# Altium PCB PCB1.PcbDoc (part 2 of 3)
Units mm, origin at the board's own origin, x right, y up, seen from the top; angles counter-clockwise.
Board outline 152.4 x 101.6 mm, 2 copper layers (Top Layer, Bottom Layer); 246 components, 0 nets, 683 pads, 311 vias.
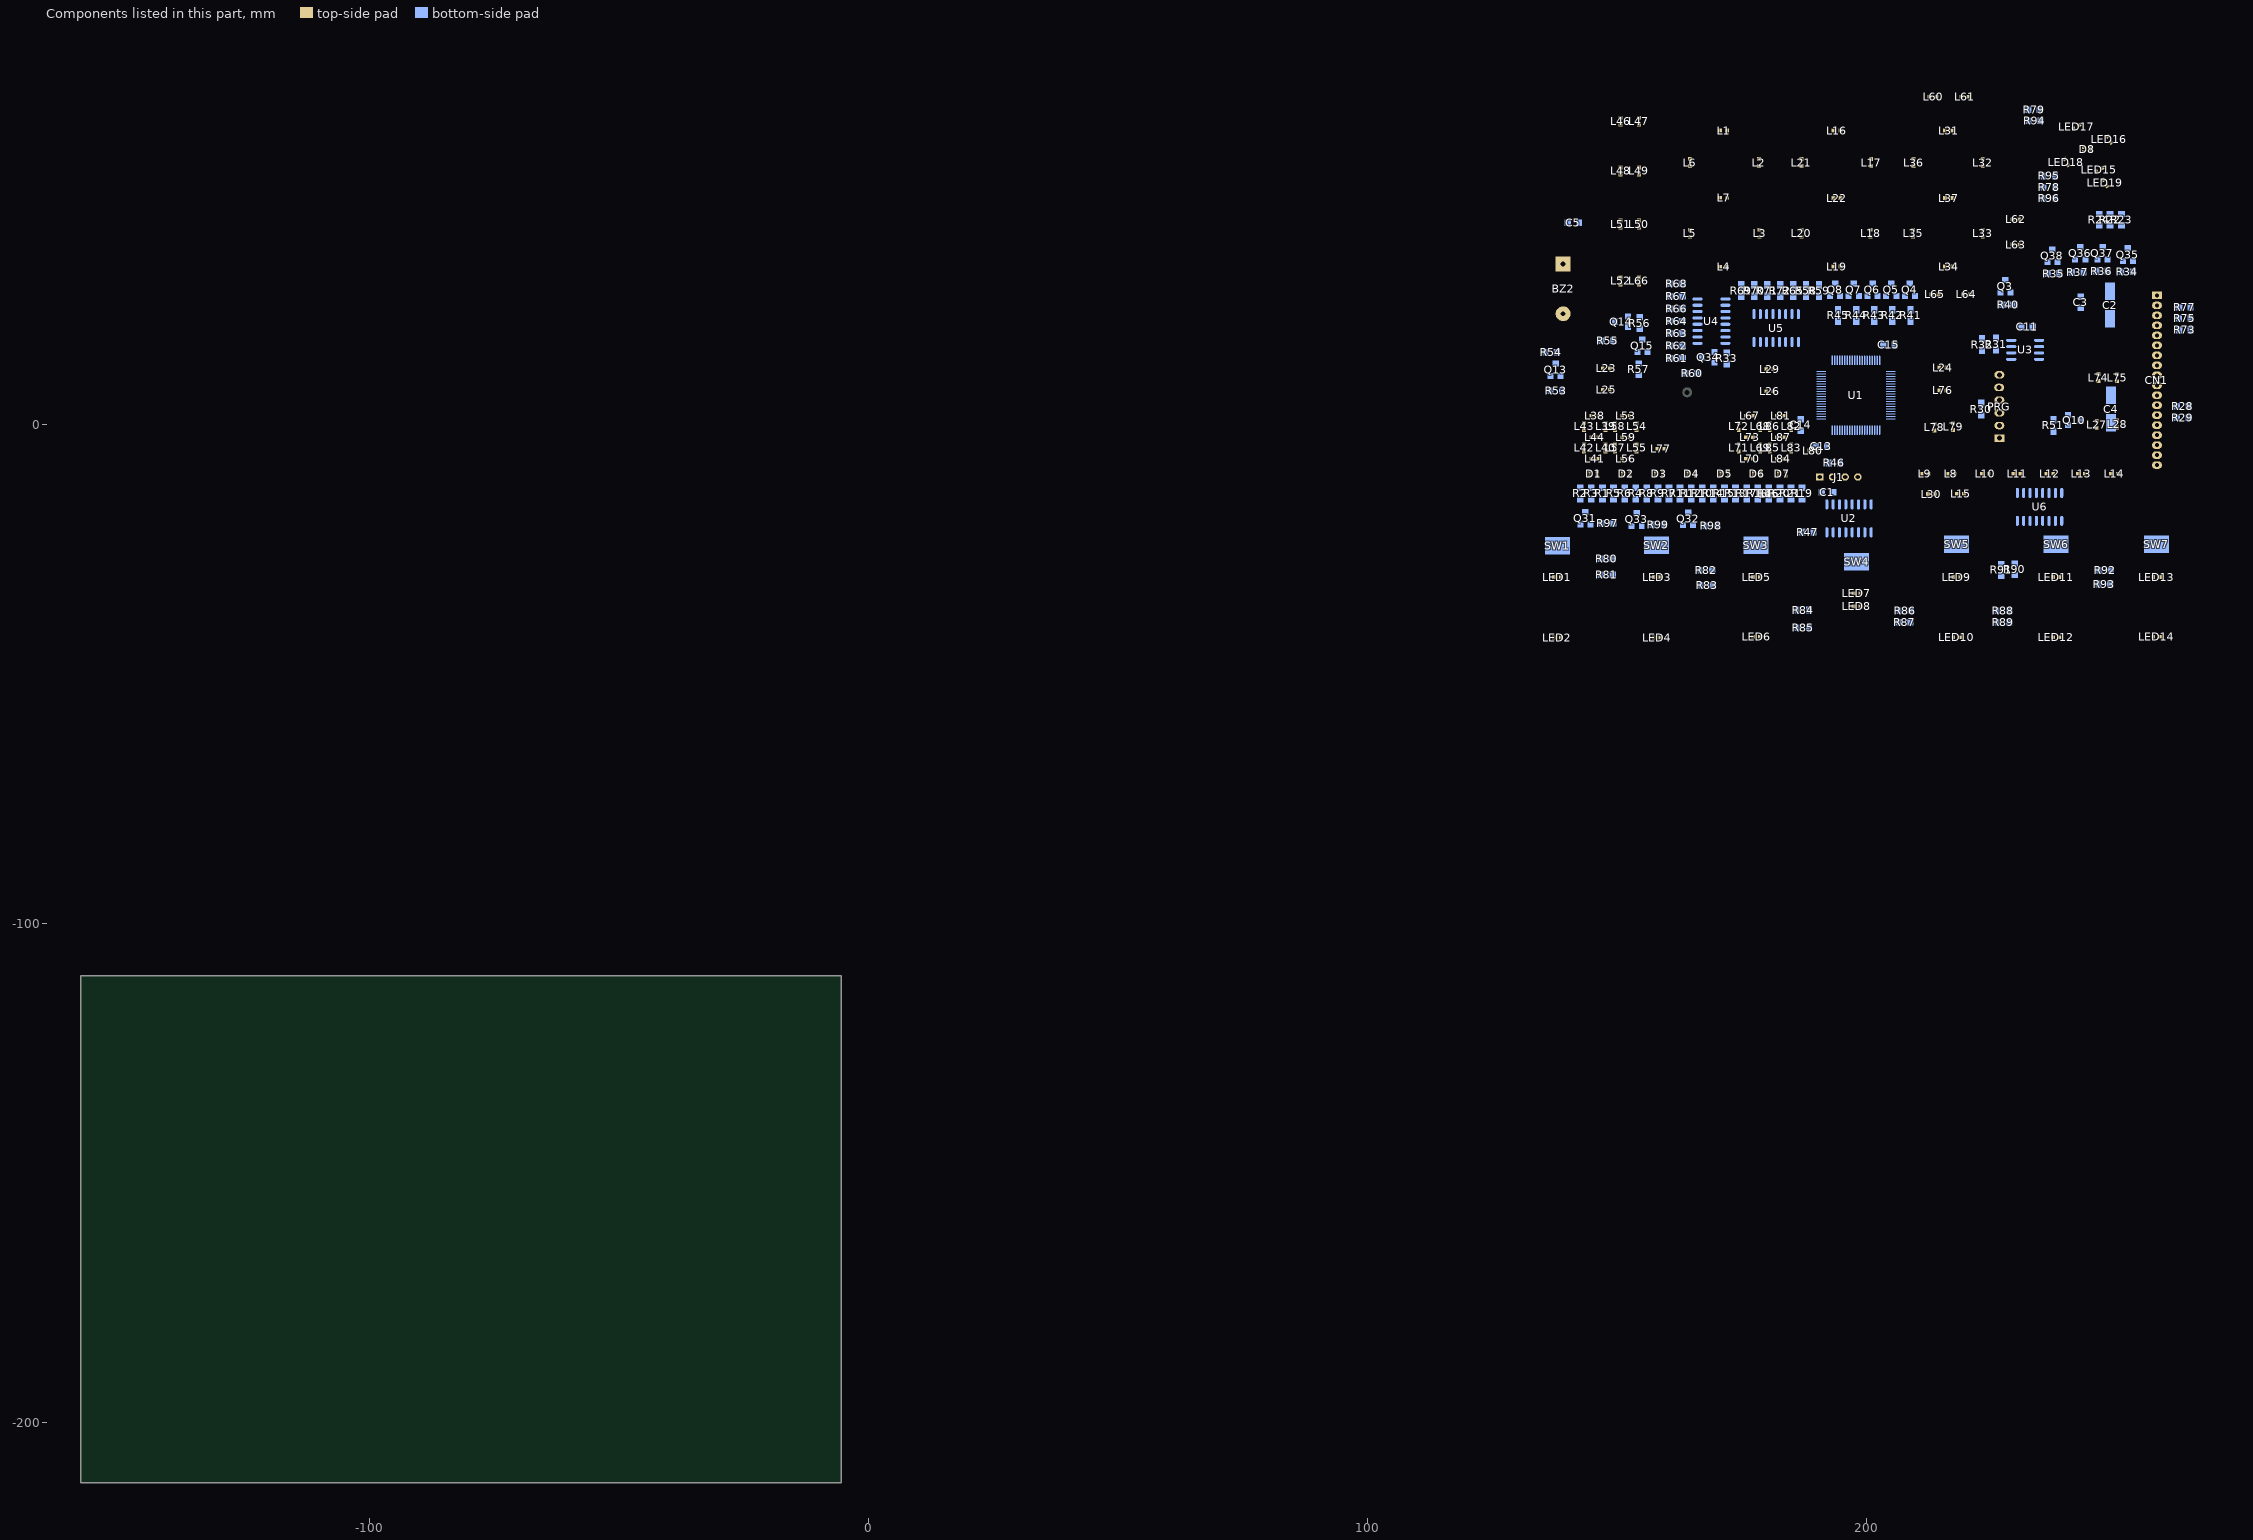
[diagram p2: the components of this part, seen from the top]

## Via types
v1: diameter 1, hole 0.6, Top Layer to Bottom Layer, 214 vias
v2: diameter 1.27, hole 0.711, Top Layer to Bottom Layer, 93 vias
v3: diameter 0.8, hole 0.4, Top Layer to Bottom Layer, 3 vias
v4: diameter 1, hole 0.5, Top Layer to Bottom Layer, 1 vias

## Nets (pads, with @x,y where several pads share a name; then routed paths per layer and width w, separated by ;. In a path a pad name is that pad's centre, name@x,y a point inside that pad or via, vN(x,y) a via of type N, cw(c..) or ccw(c..) an arc to the next point about the centre after c; other vN are vias at no path point) (continued)
copper on no net: | length 9829.2
  Top Layer w0.25: v1(138.952,1.055) 139.161,1.055 140.278,-0.062 140.278,-9.237 142.966,-11.924 143.244,-12.202 143.638,-12.202 144.661,-13.225 177.214,-13.225 179.054,-15.065 181.858,-15.065 183.916,-13.008 208.082,-13.008 211.104,-16.03 219.189,-16.03 220.71,-14.509 220.71,-11.563 v1(220.69,-11.543) ; v1(143.398,-9.906) 143.398,-9.918 143.448,-9.968 143.626,-9.968 144.006,-10.348 144.489,-10.348 ; 147.624,-1.128 148.31,-1.128 149.016,-1.834 150.047,-1.834 150.237,-1.644 150.237,-1.05 150.615,-0.672 152.035,-0.672 152.25,-0.887 153.404,-0.887 153.734,-1.218 153.824,-1.128 v1@158.079,-1.128 ; v1@148.45,-0.657 v1@148.579,-0.786 ; v1(158.079,-1.027) v1@158.079,-1.128 ; 184.825,-1.127 184.798,-1.127 184.266,-0.596 182.463,-0.596 181.226,-1.833 179.154,-1.833 178.625,-1.304 178.625,-1.127 178.141,-1.612 177.333,-1.612 176.47,-0.748 175.859,-0.748 175.024,-1.583 175.024,-1.643 174.833,-1.833 173.802,-1.833 173.096,-1.128 v1@158.079,-1.128 ; v1(188.203,-1.078) 188.406,-1.078 188.635,-0.85 189.092,-0.85 190.718,-2.475 v1(191.454,-2.475) ; v1(189.524,-8.266) 190.553,-9.295 190.553,-10.558 ; 189.854,-5.274 192.389,-5.274 194.528,-3.136 194.528,0.065 194.807,0.344 196.306,0.344 196.585,0.624 196.991,0.624 197.715,1.347 197.715,3.837 196.407,5.145 190.489,5.145 189.854,5.78 189.854,8.853 ; v1(195.518,29.046) 195.645,28.919 208.03,28.919 208.445,28.504 208.445,26.749 213.074,22.12 215.602,22.12 216.818,20.904 216.818,16.005 214.517,13.705 214.517,13.699 213.73,12.911 213.73,12.181 209.666,8.117 209.666,5.373 ; v1(197.068,-3.186) 204.053,-3.186 v1(206.034,-5.168) ; v2(198.312,31.231) 206.355,31.231 208.895,28.691 208.895,26.936 213.261,22.57 215.788,22.57 217.268,21.091 217.268,15.813 214.492,13.037 214.492,11.377 ; v2(198.795,1.055) 201.716,1.055 205.678,-2.907 v1(205.881,-2.907) ; v1(199.252,9.463) 201.919,9.463 205.805,13.349 v1(207.355,13.349) ; v1@201.068,14.911 v1(201.233,15.076) ; v1(210.707,-9.054) 210.707,-9.705 210.923,-9.921 ; v1(212.231,8.421) 213.847,6.805 214.492,6.805 ; 213.501,0.128 213.501,2.478 219.293,8.269 219.293,11.19 218.625,11.858 218.625,22.257 222.214,25.846 v1(222.214,27.217) ; 215.025,23.131 215.864,23.131 217.718,21.277 v1(217.718,10.225) ; 215.381,23.585 216.245,23.585 218.168,21.662 218.168,20.773 218.175,20.766 218.175,11.596 218.759,11.012 218.759,9.666 217.248,8.155 ; 215.889,11.377 215.889,10.098 v1(215.94,10.047) ; v1(217.438,-5.828) 217.501,-5.765 220.627,-5.765 220.893,-6.031 233.161,-6.031 v1(234.202,-4.99) ; v1(218.023,-2.805) 219.647,-2.805 220.385,-3.544 220.385,-3.905 220.817,-4.337 221.818,-4.337 222.163,-4.681 231.362,-4.681 232.367,-3.676 237.929,-3.676 244.457,2.852 249.637,2.852 251.829,5.044 251.829,6.771 253.556,8.498 256.199,8.498 256.199,13.905 258.117,15.823 ; v1(218.353,-1.561) 219.147,-2.355 219.833,-2.355 221.248,-3.771 221.248,-3.796 221.914,-3.796 222.349,-4.231 231.175,-4.231 232.804,-2.602 v2(235.345,-2.602) ; v1(218.48,0.878) 218.701,1.099 220.443,1.099 221.236,0.306 223.395,0.306 224.017,-0.316 224.017,-1.078 v1(223.788,-1.307) ; v1(218.81,-6.59) 235.066,-6.59 v1(235.295,-6.361) ; v1@219.191,-0.926 220.588,-2.323 221.96,-2.323 v1(222.874,-3.237) ; v1(219.267,-4.939) 219.552,-4.939 219.928,-5.315 221.135,-5.315 221.401,-5.581 232.45,-5.581 232.653,-5.378 v1(232.653,-5.193) ; v1(219.394,-3.72) 220.461,-4.787 221.412,-4.787 221.756,-5.131 231.548,-5.131 232.553,-4.126 236.158,-4.126 236.209,-4.177 237.987,-4.177 238.012,-4.202 238.23,-4.202 244.834,2.402 249.823,2.402 252.516,5.094 252.516,6.821 253.517,7.823 258.117,7.823 ; v1(219.611,0.274) 220.557,-0.672 v1(222.62,-0.672) ; v1(220.842,18.912) 223.306,21.375 223.306,22.188 241.06,22.188 250.116,13.133 250.116,10.044 250.1,10.06 246.394,10.06 ; v1(220.969,12.231) 221.311,12.574 222.835,12.574 223.888,11.52 231.078,11.52 231.891,10.707 238.412,10.707 238.444,10.675 240.407,10.675 243.042,8.04 243.118,8.04 243.321,8.244 v1(243.118,8.244) ; v1(222.493,11.749) 223.204,11.038 230.672,11.038 231.485,10.225 238.317,10.225 v1(242.483,6.059) ; v1(228.259,18.581) 234.348,18.581 236.557,16.372 v1(237.123,16.372) ; v1(228.868,19.699) 235.98,19.699 v1(237.073,18.607) ; 230.786,-9.295 232.018,-8.063 236.59,-8.063 237.314,-8.787 237.314,-9.422 237.314,-9.921 ; v1(234.685,28.513) 237.53,25.668 v1(237.53,23.153) ; v2(236.412,12.257) 243.677,12.257 v1(245.607,14.187) ; v1(237.936,-8.19) 237.936,-7.86 244.921,-0.875 244.921,0.37 245.213,0.662 246.064,0.662 ; v1(240.73,-11.391) 240.73,-9.921 ; v1(241.314,-7.682) 241.314,-7.403 242.241,-6.476
  Top Layer w0.254: v2(136.235,-30.593) 136.251,-30.609 137.277,-30.609 ; v1(136.641,-3.313) 136.989,-3.661 136.989,-9.155 142.403,-14.569 142.797,-14.569 143.721,-15.493 176.26,-15.493 178.151,-17.385 182.746,-17.385 184.855,-15.276 207.142,-15.276 210.165,-18.298 222.937,-18.298 228.455,-12.781 246.036,-12.781 248.896,-9.921 ; 137.277,-42.725 137.277,-42.278 v2(136.412,-41.413) 137.809,-40.016 144.515,-40.016 147.223,-42.725 157.252,-42.725 157.252,-41.272 158.482,-40.042 v2(174.662,-40.042) 177.177,-42.556 ; v1(137.301,-0.088) 137.581,-0.088 137.581,-5.302 137.443,-5.44 137.443,-8.967 142.591,-14.115 142.985,-14.115 143.909,-15.039 176.448,-15.039 176.865,-15.457 176.88,-15.457 178.302,-16.879 182.61,-16.879 184.667,-14.822 207.33,-14.822 210.353,-17.844 222.749,-17.844 228.267,-12.327 232.021,-12.327 233.72,-10.629 238.546,-10.629 239.254,-9.921 240.73,-9.921 242.241,-9.921 242.381,-10.06 ; 138.674,-42.725 139.8,-42.725 v2(139.968,-42.556) ; 138.674,-30.609 140.028,-30.609 v2(140.095,-30.542) ; v1(138.724,-6.463) 138.673,-6.514 139.372,-7.213 139.372,-9.612 142.928,-13.168 143.322,-13.168 144.285,-14.131 176.824,-14.131 177.241,-14.549 177.256,-14.549 178.679,-15.971 182.233,-15.971 184.291,-13.914 207.707,-13.914 210.729,-16.936 222.373,-16.936 229.389,-9.921 ; v1(138.978,-4.507) 138.876,-4.406 138.876,-4.787 137.897,-5.766 137.897,-8.779 142.747,-13.628 143.141,-13.628 144.097,-14.585 176.636,-14.585 177.053,-15.003 177.068,-15.003 178.491,-16.425 182.421,-16.425 184.479,-14.368 207.518,-14.368 210.541,-17.39 222.561,-17.39 228.079,-11.873 231.485,-11.873 233.437,-9.921 235.917,-9.921 ; v1(140.299,2.325) 140.73,1.894 140.73,-9.05 143.431,-11.75 143.825,-11.75 144.848,-12.773 177.401,-12.773 179.241,-14.613 181.671,-14.613 183.728,-12.556 208.269,-12.556 211.292,-15.578 212.654,-15.578 212.882,-15.35 219.23,-15.35 220.258,-14.322 220.258,-12.686 v1(219.47,-11.899) ; v1(142.051,-7.225) 141.238,-6.412 141.238,3.037 ; v2@142.61,-16.521 142.61,-17.309 142.864,-17.563 149.138,-17.563 149.214,-17.639 v1(156.123,-17.639) 162.346,-17.639 162.422,-17.563 v1(162.422,-17.512) v1(169.331,-17.512) 175.249,-17.512 175.63,-17.893 175.63,-18.757 176.189,-19.315 183.352,-19.315 v1(184.241,-18.426) ; v1(143.042,11.063) 143.042,43.219 146.445,46.623 146.445,61.304 149.967,64.826 155.472,64.826 156.812,63.485 190.816,63.485 194.451,67.121 v1(194.655,67.121) ; 143.317,-4.038 145.543,-4.038 146.268,-3.313 148.807,-3.313 149.531,-4.038 149.769,-4.275 152.062,-4.275 153.227,-3.11 173.39,-3.11 174.318,-4.038 176.792,-4.038 177.5,-3.33 179.99,-3.33 180.518,-3.858 180.518,-4.038 ; 143.317,0.269 v1@144.821,0.269 ; v2(143.702,-8.571) 144.489,-9.358 144.489,-9.498 ; v1(143.778,3.189) 144.773,2.195 144.773,1.726 143.356,1.726 142.559,0.928 142.559,-0.748 142.939,-1.128 143.118,-1.128 ; v1(144.744,-5.701) 144.744,-6.881 144.773,-6.91 145.481,-6.202 147.556,-6.202 148.264,-6.91 150.973,-6.91 150.973,-7.155 151.551,-7.733 163.159,-7.733 ; v1(144.794,0.243) v1@144.821,0.269 ; v1@144.871,0.293 v1@144.846,0.269 ; v1@145.175,-11.492 145.939,-10.729 145.939,-10.348 ; v1(145.531,-18.579) 145.782,-18.83 151.878,-18.83 v1(151.881,-18.833) 158.282,-18.833 v1(158.51,-18.604) 166.461,-18.604 v1(166.511,-18.553) 170.855,-18.553 171.185,-18.884 v1(171.287,-18.884) 175.02,-18.884 ; 145.939,-9.498 146.129,-9.689 146.903,-9.689 147.131,-9.917 147.131,-11.289 v1(147.055,-11.365) ; 146.17,-6.91 145.455,-7.625 144.179,-7.625 143.748,-7.195 ; 146.17,-2.581 149.396,-2.581 150.636,-3.821 151.754,-3.821 152.37,-3.206 152.37,-2.581 159.628,-2.581 160.63,-1.58 163.935,-1.58 164.937,-2.581 174.086,-2.581 174.97,-3.466 176.722,-3.466 177.17,-3.018 177.17,-2.582 180.748,-2.582 181.456,-3.29 182.92,-3.29 183.37,-2.84 183.37,-2.582 ; 146.17,1.726 148.717,1.726 149.465,0.977 151.449,0.977 152.197,1.726 152.37,1.726 174.45,1.726 175.324,0.852 176.296,0.852 177.17,1.725 180.288,1.725 181.187,0.827 182.471,0.827 183.37,1.725 ; v1(146.268,-5.168) 147.233,-5.168 147.624,-5.559 ; v1(146.852,-16.394) 146.877,-16.42 v1(153.837,-16.42) v1(160.161,-16.42) 160.212,-16.369 v1(167.096,-16.369) 167.223,-16.496 v1(173.522,-16.496) 174.084,-17.058 175.437,-17.058 176.084,-17.705 176.084,-18.477 176.468,-18.861 180.38,-18.861 180.764,-18.477 v1(181.193,-18.477) 182.536,-18.477 183.414,-17.599 183.936,-17.599 183.987,-17.549 186.134,-17.549 186.781,-16.902 v1(186.781,-16.521) ; 147.055,6.932 147.055,7.99 ; 147.055,11.25 147.055,7.99 ; 147.624,-5.435 147.624,-5.559 ; 147.624,-4.038 146.185,-4.038 145.614,-4.609 144.143,-4.609 143.317,-5.435 ; 147.624,0.269 146.531,-0.824 145.48,-0.824 144.773,-1.532 144.773,-2.581 143.319,-1.128 143.317,-1.128 143.118,-1.128 ; 148.452,6.932 148.452,6.288 147.207,5.043 143.245,5.043 141.238,3.037 ; 148.452,11.25 148.512,11.19 v1(150.078,11.19) ; v1(148.833,-11.289) 148.782,-11.238 148.782,-10.425 149.712,-9.496 151.061,-9.496 ; 149.531,-5.435 151.708,-5.435 152.162,-4.981 152.881,-4.981 153.824,-4.038 ; 149.531,-1.128 149.531,-1.117 150.442,-0.205 151.719,-0.205 152.194,0.269 153.824,0.269 ; v4@150.001,1.716 150.963,1.716 150.973,1.726 ; v1(150.128,8.98) 150.332,8.98 150.905,9.553 150.905,11.76 149.341,13.324 149.341,26.773 150.611,28.043 149.557,28.043 149.227,28.373 149.227,39.422 ; 150.611,29.44 154.294,29.44 154.662,29.808 v1(155.259,29.808) ; 150.611,40.819 150.611,41.01 155.691,46.09 157.291,46.09 161.508,50.306 v2(161.508,50.738) ; 150.611,51.487 150.611,52.617 151.906,53.913 155.335,53.913 158.993,50.255 v2(158.993,49.925) ; 150.611,61.419 150.611,61.914 151.729,63.031 169.966,63.031 171.947,61.05 171.947,58.875 179.094,58.875 181.802,61.584 v2@190.311,61.584 ; v2(150.865,-25.818) 150.078,-26.605 150.078,-35.394 153.583,-38.899 165.419,-38.899 167.553,-36.765 167.553,-25.894 173.141,-20.306 187.564,-20.306 192.14,-15.73 205.272,-15.73 208.959,-19.417 v2(228.818,-19.417) ; 150.973,-2.581 150.973,-1.783 v1(151.221,-1.535) ; v1@151.652,-11.543 152.511,-10.685 152.511,-10.346 ; 152.37,-6.91 152.385,-6.895 v1(153.532,-6.895) ; 152.511,-9.496 153.796,-9.496 153.964,-9.663 v1(153.964,-10.806) ; 154.294,28.043 154.294,26.1 153.913,26.1 v1(153.888,26.074) 149.795,21.982 149.795,13.512 151.525,11.781 151.525,8.962 156.87,3.618 158.597,3.618 159.203,3.011 171.16,3.011 v1(171.21,3.062) ; 154.294,39.448 154.269,39.422 150.611,39.422 149.227,39.422 ; 154.294,40.819 162.701,40.819 164.52,39 171.283,39 172.912,40.629 185.244,40.629 186.872,39 188.174,39 189.676,40.502 207.723,40.502 209.224,39 209.507,39.282 v2(211.546,39.282) ; 154.294,50.065 154.269,50.09 150.611,50.09 148.896,50.09 ; 154.294,51.462 155.577,51.462 157.139,49.9 v2(157.139,47.868) ; 154.294,61.419 165.102,61.419 165.775,60.745 v2(169.904,60.745) ; v1(155.615,-11.137) 155.615,-10.07 156.189,-9.496 157.633,-9.496 ; v2(155.615,7.329) 156.275,7.99 156.275,10.504 157.977,12.206 167.319,12.206 169.729,9.796 173.036,9.796 175.325,7.507 v1(175.859,7.507) ; v1(155.869,11.901) 156.707,12.739 167.604,12.739 168.678,11.665 168.678,11.489 169.906,10.261 172.952,10.261 172.963,10.25 174.716,10.25 176.341,8.625 v1(177.179,8.625) ; v2(156.072,-30.618) 157.243,-30.618 157.252,-30.609 ; v1(157.774,-6.285) 157.774,-5.082 157.977,-4.879 ; v1@158.307,-11.619 158.307,-11.121 159.083,-10.346 ; 158.649,-42.725 159.593,-42.725 v2(159.831,-42.963) ; 158.649,-30.609 158.716,-30.542 v2(159.831,-30.542) ; 159.083,-9.496 160.121,-9.496 160.492,-9.867 v1(160.492,-11.213) ; 159.374,-4.879 160.058,-5.563 164.287,-5.563 165.038,-4.812 165.038,-4.71 165.191,-4.71 v1(165.216,-4.736) ; v1(161.939,60.212) 161.749,60.022 154.294,60.022 150.611,60.022 148.681,58.091 148.681,50.306 148.896,50.09 ; v1(161.99,-4.736) 161.99,-3.898 ; v1(162.092,39.13) 162.092,33.186 161.317,32.412 161.317,31.904 150.249,20.836 150.249,13.7 151.979,11.969 151.979,9.15 157.058,4.072 159.225,4.072 159.831,3.465 165.292,3.465 165.676,3.849 v1(165.927,3.849) ; v1(162.193,-11.238) 161.99,-11.035 161.99,-10.222 162.717,-9.496 164.205,-9.496 164.145,-9.435 ; v1(162.498,0.141) 162.193,0.446 162.193,0.977 ; v1@162.752,-2.958 162.752,-2.602 v1@162.816,-2.539 ; v1(163.133,-6.819) 163.159,-6.844 163.159,-7.733 ; 164.52,53.138 v2@166.765,53.138 ; v1@164.886,-11.568 165.655,-10.799 165.655,-10.346 ; v1@165.368,-2.323 v1(165.419,-2.272) ; 165.655,-9.496 166.267,-9.496 167.172,-10.4 167.146,-10.425 v1(167.146,-11.035) ; v2(166.765,53.125) v2@166.765,53.138 ; v1(168.924,-11.441) 168.721,-11.238 168.721,-9.943 169.168,-9.496 170.778,-9.496 ; v2(169.102,-30.542) 169.102,-25.665 174.008,-20.76 187.752,-20.76 192.27,-16.242 205.018,-16.242 209.387,-20.611 v2(227.471,-20.611) ; v2(169.382,33.009) 170.55,31.84 170.55,31.57 ; v1(169.483,27.421) 171.49,29.427 192.496,29.427 v3@192.572,29.503 ; v1(169.509,19.115) 169.331,18.937 169.331,17.997 178.449,8.879 178.449,7.863 177.684,7.097 176.619,7.097 174.996,5.475 v1(172.328,5.475) ; v2(169.864,40.375) 170.55,41.06 170.55,45.413 170.55,45.712 164.52,51.741 162.993,51.741 162.117,52.617 162.117,55.869 165.124,58.875 170.55,58.875 170.55,53.887 170.575,53.887 171.324,53.138 178.361,53.138 ; v2(170.245,37.581) v2@170.245,37.603 ; 170.382,31.739 170.55,31.57 ; 171.856,34.101 171.947,34.101 ; v1(171.896,-11.492) 171.896,-10.677 172.228,-10.346 ; 171.947,31.57 171.947,34.101 ; v2(172.023,44.185) 172.023,45.337 171.947,45.413 179.729,45.413 181.294,46.979 194.121,46.979 194.683,46.417 194.683,45.328 195.011,45.328 197.042,47.36 215.584,47.36 217.035,45.909 217.035,45.328 ; 172.228,-9.496 172.998,-9.496 173.623,-10.121 173.623,-10.883 v1(173.7,-10.959) ; v1(172.531,28.005) 175.122,28.005 v1(183.326,19.801) ; v2(173.014,35.65) 177.967,35.65 v2(178.5,36.184) 178.5,37.59 178.488,37.603 180.383,37.603 182.437,35.549 198.658,35.549 200.713,37.603 202.354,37.603 205.424,34.533 220.136,34.533 v2@221.937,36.333 ; 174.318,-5.435 174.779,-5.435 175.63,-4.583 178.079,-4.583 178.625,-4.038 ; 174.318,-1.127 174.514,-1.127 175.372,-0.269 177.158,-0.269 177.696,0.27 178.625,0.27 ; v1(174.639,-18.503) 175.02,-18.884 ; v1(175.655,2.554) 175.773,2.437 175.773,1.725 ; 175.773,-2.582 175.773,-2.002 v1(176.163,-1.612) ; v1@175.782,-11.264 175.147,-11.264 174.69,-10.806 174.69,-9.968 175.579,-9.079 176.838,-9.079 177.255,-9.496 ; v2(176.062,-30.593) 177.16,-30.593 177.177,-30.609 ; v2(176.392,51.525) 176.608,51.741 178.361,51.741 179.961,51.741 183.58,55.361 v2@187.898,55.361 ; 177.17,-6.911 177.957,-6.911 v1(178.094,-7.047) ; v1@178.17,-11.645 178.17,-10.88 178.705,-10.346 ; 178.488,39 173.671,39 171.947,37.276 ; 178.574,-42.556 179.846,-42.556 v2(180.024,-42.379) ; 178.574,-30.609 179.914,-30.609 v2(179.948,-30.644) ; v1(178.78,5.119) 180.024,5.119 181.231,6.326 181.231,6.643 ; 178.842,-9.359 178.705,-9.496 179.196,-9.496 179.567,-9.867 179.567,-11.289 v1(179.694,-11.416) ; v1(178.881,2.96) 178.881,3.748 179.799,4.665 180.212,4.665 181.482,5.935 181.747,5.935 182.209,6.397 182.209,9.336 181.231,10.314 181.231,11.063 ; 179.757,-13.905 179.757,-13.435 178.558,-12.236 176.189,-12.236 176.106,-12.319 145.036,-12.319 143.772,-11.055 143.378,-11.055 142.534,-10.211 142.534,-8.19 143.529,-7.195 143.748,-7.195 ; 180.518,-5.435 180.545,-5.435 181.824,-4.155 183.084,-4.155 183.512,-4.583 184.279,-4.583 184.825,-4.038 ; 180.52,-1.127 180.52,-1.065 181.828,0.243 184.798,0.243 ; 180.52,0.27 179.734,1.055 177.84,1.055 177.054,0.27 174.318,0.27 173.61,0.977 162.193,0.977 ; 181.154,-13.905 181.154,-13.207 182.259,-12.102 201.741,-12.102 ; v1(181.218,3.189) 181.218,3.316 181.548,3.646 193.181,3.646 v1(195.544,1.284) ; v1(181.548,-11.568) 180.837,-11.568 180.521,-11.252 180.521,-11.073 180.253,-10.805 180.253,-10.756 180.021,-10.524 180.021,-10.044 180.681,-9.384 182.223,-9.384 182.335,-9.496 182.335,-9.459 ; v1(181.828,4.688) 182.031,4.484 195.213,4.484 v1(196.89,2.808) ; 181.973,-2.582 181.973,-2.127 182.742,-1.358 183.529,-1.358 v1(184.825,-2.653) 184.825,-4.038 ; 181.973,1.725 181.973,1.861 183.021,2.91 183.961,2.91 184.798,2.073 184.798,0.243 ; 182.31,34.533 182.437,34.66 ; v1(182.691,-5.574) 181.973,-6.292 181.973,-6.889 179.409,-6.889 178.722,-6.203 176.195,-6.203 175.773,-6.625 175.773,-6.911 174.95,-7.733 163.159,-7.733 ; 183.37,-6.889 184.983,-6.889 186.062,-5.81 186.062,-5.274 ; 183.518,-5.233 183.72,-5.435 184.825,-5.435 ; 183.518,-5.231 182.896,-4.609 182.209,-4.609 181.281,-5.536 181.281,-6.018 181.066,-6.234 179.425,-6.234 178.625,-5.435 178.311,-5.749 175.228,-5.749 174.834,-6.143 173.801,-6.143 171.556,-3.898 161.99,-3.898 ; 183.785,-10.346 184.389,-10.346 v1(185.104,-11.06) ; 183.785,-9.496 184.709,-9.496 186.248,-11.035 v1(186.781,-11.035) ; 184.823,0.217 184.798,0.243 ; 184.825,0.27 184.798,0.243 ; v1(185.307,-7.809) 185.917,-7.809 187.72,-6.006 199.1,-6.006 201.741,-8.647 201.741,-12.102 ; v1(186.044,-18.426) 186.044,-19.087 185.279,-19.852 175.989,-19.852 175.02,-18.884 ; 186.872,37.603 197.318,37.603 198.715,39 200.713,39 ; 186.872,51.741 189.231,51.741 v2(192.216,48.757) ; v1@187.619,18.835 187.619,16.829 189.854,14.594 189.854,8.853 ; v2(187.898,55.488) v2@187.898,55.361 ; v2(188.432,-38.924) 190.108,-38.924 193.054,-41.871 204.307,-41.871 206.821,-39.356 206.821,-24.174 209.8,-21.195 224.068,-21.195 224.957,-22.084 v2(227.014,-22.084) ; 188.457,-5.295 188.457,-5.274 186.062,-5.274 ; v2(190.311,61.711) v2@190.311,61.584 ; v2(191.53,31.688) 190.616,32.602 176.113,32.602 173.779,30.269 169.658,30.269 164.52,35.406 164.52,37.603 v2@170.245,37.603 ; v1@191.886,-18.68 v1(191.886,-18.553) ; v2(192.216,45.074) 192.471,45.328 193.286,45.328 ; 193.286,58.875 193.286,57.847 193.994,57.139 195.391,57.139 199.391,53.138 200.84,53.138 ; v3(194.985,7.151) 194.985,13.273 195.188,13.476 ; v1(196.509,15.051) 196.509,16.219 197.88,17.591 213.324,17.591 v1(214.035,16.88) ; v1(197.093,32.475) 207.431,32.475 v1(208.625,31.281) ; 197.277,-36.502 197.277,-33.835 ; v2(198.312,31.231) 197.931,31.612 194.683,31.612 194.683,31.03 194.375,30.723 194.375,28.945 193.893,28.462 190.413,28.462 188.559,26.608 188.559,20.664 184.761,16.867 182.17,16.867 179.834,14.53 179.834,11.063 179.834,6.643 177.256,6.643 172.792,2.18 159.393,2.18 158.409,3.164 156.682,3.164 151.856,7.99 147.055,7.99 ; 198.674,-36.502 198.715,-36.46 v2(200.42,-36.46) ; 198.674,-33.835 199.649,-33.835 v2@199.658,-33.844 ; v1(200.192,16.041) 201.233,17.083 211.495,17.083 v1(212.892,15.686) ; 200.84,51.741 203.71,51.741 207.075,55.107 217.997,55.107 221.362,51.741 223.192,51.741 225.198,51.741 225.668,52.211 225.668,56.935 220.296,62.308 220.296,65.648 ; 201.233,51.805 199.328,51.805 195.772,55.361 v2@187.898,55.361 ; v2(205.805,50.789) v2@205.742,50.852 ; v1(206.364,35.904) 208.063,37.603 209.224,37.603 216.749,37.603 218.132,38.985 ; 209.349,51.741 210.682,50.408 215.33,50.408 ; 209.349,53.138 209.031,52.821 207.71,52.821 v2@205.742,50.852 ; v1(209.666,-3.517) 209.666,5.373 ; v1(210.225,-6.539) 210.225,-7.276 212.32,-9.371 ; v2(211.139,-39.153) 223.001,-39.153 226.506,-35.648 226.506,-25.259 v2(228.868,-22.897) ; v1(211.622,30.291) 211.52,30.189 211.52,25.592 213.527,23.585 215.381,23.585 ; 212.206,-13.987 211.577,-13.987 209.387,-11.797 209.387,-4.99 209.818,-4.558 210.707,-4.558 ; 212.32,-10.133 212.32,-9.921 212.32,-9.371 ; 212.549,65.648 212.549,66.626 213.4,67.476 218.023,67.476 218.899,66.6 ; v1(212.612,27.141) 212.93,26.824 212.93,26.024 212.93,25.439 213.616,24.754 219.356,24.754 220.626,26.024 220.626,27.052 222.506,28.932 224.944,28.932 v2(227.624,31.612) ; 213.946,65.648 213.946,61.012 214.009,60.949 ; 214.327,26.024 214.327,29.592 211.927,31.993 v2(211.876,31.993) 210.163,30.28 209.831,30.28 209.347,29.795 209.347,27.123 213.339,23.131 215.025,23.131 ; 214.492,6.805 214.492,4.84 211.952,2.3 211.952,0.281 213.501,-1.269 217.159,-1.269 217.261,-1.167 ; 214.492,11.377 213.587,11.377 210.707,8.498 210.707,-4.558 ; 215.638,45.328 215.638,41.479 218.132,38.985 ; 215.638,58.875 215.638,57.72 217.489,55.869 219.521,55.869 222.251,53.138 223.192,53.138 ; 215.889,6.805 215.899,6.805 217.248,8.155 ; v2(215.991,-30.618) 217.268,-30.618 217.277,-30.609 ; v2(216.092,53.456) 215.33,52.694 215.33,50.408 ; 216.13,-9.921 216.13,-10.768 v1(216.727,-11.365) ; v2(216.524,-41.972) v2@216.56,-41.972 ; 217.035,31.612 219.776,31.612 224.347,36.184 224.347,38.724 224.086,38.985 223.192,38.985 ; 217.035,58.875 217.035,59.879 215.965,60.949 214.009,60.949 ; 217.261,0.23 217.261,4.662 v1(220.334,7.736) ; 217.277,-42.689 v2@216.56,-41.972 ; 218.048,-13.91 218.048,-10.441 217.527,-9.921 ; 218.674,-42.689 220.67,-42.689 v2(220.69,-42.709) ; 218.674,-30.609 219.962,-30.609 v2(220.055,-30.517) ; v2(218.861,27.675) 219.229,27.306 219.229,26.024 ; 218.899,65.648 218.899,66.6 ; 219.445,-13.91 219.445,-14.388 218.937,-14.896 214.512,-14.896 213.603,-13.987 212.466,-15.124 211.495,-15.124 208.472,-12.102 201.741,-12.102 ; v2(221.883,36.387) v2@221.937,36.333 ; 222.988,-9.921 222.988,-10.783 221.162,-12.61 221.162,-14.703 219.382,-16.482 210.917,-16.482 207.895,-13.46 184.103,-13.46 182.045,-15.517 178.867,-15.517 177.444,-14.095 177.027,-13.677 144.474,-13.677 143.478,-12.682 143.084,-12.682 142.887,-12.485 139.826,-9.424 139.826,-0.875 138.723,0.228 138.61,0.228 137.936,0.902 137.936,1.868 139.221,3.152 140.641,3.152 140.757,3.037 141.238,3.037 ; 223.192,37.588 v2@221.937,36.333 ; 223.306,22.188 225.287,24.169 225.287,24.855 225.465,25.033 v1(225.465,27.979) ; 226.532,4.84 228.183,3.189 v1(240.171,3.189) ; v2(227.573,34.609) 228.97,36.006 229.135,36.006 229.135,41.06 227.852,41.06 226.786,42.127 226.786,65.495 224.271,68.01 220.309,68.01 218.899,66.6 ; v1(227.878,51.525) 233.669,45.734 233.669,31.183 235.512,29.34 235.512,28.6 251.373,12.739 251.373,9.234 250.785,8.647 250.116,8.647 ; v2@229.986,-26.707 229.986,-26.453 234.812,-21.627 234.939,-21.627 236.666,-19.9 v2(236.666,-16.953) ; v2(230.316,-38.442) 228.716,-36.841 228.716,-26.185 229.613,-25.288 229.703,-25.288 234.761,-20.23 v2(234.761,-17.131) ; v2(230.443,39.536) 230.532,39.625 230.532,41.06 ; 230.532,36.006 230.532,34.139 229.503,33.11 227.116,33.11 223.636,29.63 216.981,29.63 215.638,30.974 215.638,31.612 213.606,33.644 193.994,33.644 193.286,32.935 193.286,31.612 190.238,34.66 182.437,34.66 ; 230.786,-10.222 230.786,-9.921 230.786,-9.295 230.786,-8.889 230.392,-8.495 225.811,-8.495 224.385,-9.921 224.385,-9.447 223.661,-8.724 219.496,-8.724 218.299,-9.921 217.527,-9.921 ; v1(232.043,15.559) 236.767,15.559 237.148,15.178 240.959,15.178 241.289,15.508 v1(241.289,18.277) 244.185,18.277 247.534,14.927 247.534,12.424 245.686,10.576 245.686,8.139 246.293,7.532 v1(246.293,5.018) ; v2(234.939,-41.21) 236.418,-42.689 237.252,-42.689 ; v2(235.879,-30.568) 235.921,-30.609 237.252,-30.609 ; v2(236.234,60.771) 236.26,60.745 241.834,60.745 242.592,59.987 ; 237.314,-9.422 237.631,-9.105 239.789,-9.105 239.854,-9.17 242.888,-9.17 243.638,-9.921 243.638,-9.473 244.896,-8.216 249.595,-8.216 250.293,-8.914 250.293,-9.921 ; v2(238.597,-40.499) v2@238.52,-40.575 ; 238.649,-42.689 238.649,-40.703 v2@238.52,-40.575 ; 238.649,-30.609 239.672,-30.609 v2(239.714,-30.568) ; 239.606,53.13 239.606,55.202 242.28,57.875 242.28,57.901 ; v2(239.663,49.747) 239.663,51.279 240.305,51.92 ; 241.383,59.288 241.383,58.798 242.28,57.901 ; v2(241.441,-18.223) 245.937,-22.719 v2(245.937,-27.342) ; 242.241,-6.476 244.362,-4.355 249.976,-4.355 252.135,-2.196 252.135,-0.392 251.004,0.738 250.103,0.738 ; 243.38,54.677 243.38,53.676 243.981,53.075 243.981,46.547 246.648,43.88 v2(248.147,43.88) ; 243.38,55.527 243.182,55.329 242.919,55.329 242.381,54.791 242.381,45.378 v2(244.439,43.321) ; 244.83,54.677 244.83,54.639 v2(245.785,53.684) ; 246.064,-0.735 247.893,-0.735 ; 246.394,8.663 248.16,6.897 250.585,6.897 252.135,8.447 252.135,13.603 234.279,31.459 234.279,47.385 227.24,54.424 227.24,65.683 224.459,68.464 197.191,68.464 v2@190.311,61.584 ; v2(246.572,46.572) 247.765,47.765 248.052,47.765 ; 247.164,51.351 247.744,51.351 v2(248.147,51.754) ; 247.353,48.975 247.353,49.253 245.955,50.652 245.955,52 246.953,52.998 246.953,54.7 246.126,55.527 ; 248.242,57.702 246.126,55.586 246.126,55.527 ; 248.941,56.492 249.925,57.477 v2(249.925,61.076) ; v2(249.874,-33.311) 249.9,-33.311 252.668,-36.079 252.668,-37.879 257.352,-42.562 ; 250.103,-0.659 250.179,-0.735 247.893,-0.735 ; v2(255.97,-30.644) 256.005,-30.609 257.352,-30.609 ; 258.749,-42.562 258.754,-42.556 v2(259.882,-42.556) ; 258.749,-30.609 259.822,-30.609 v2(260.187,-30.974) ; 143.118,-1.128 142.229,-2.017 142.229,-4.347 143.317,-5.435 ; 143.317,-5.435 143.317,-6.764 143.748,-7.195 ; v1@144.821,0.269 v1@144.846,0.269 ; v1@144.846,0.269 146.294,0.269 147.08,1.055 148.745,1.055 149.531,0.269 151.552,0.269 152.26,0.977 162.193,0.977 ; 147.624,-5.559 148.376,-6.311 150.348,-6.311 150.456,-6.202 151.583,-6.202 152.35,-5.435 153.824,-5.435 155.361,-3.898 161.99,-3.898 ; 148.896,50.09 148.896,47.296 148.681,47.08 148.681,39.968 149.227,39.422 ; v2@166.765,53.138 169.419,53.138 172.404,50.154 v2(174.182,50.154) 181.548,50.154 184.533,53.138 186.872,53.138 190.501,53.138 194.121,49.519 204.408,49.519 v2@205.742,50.852 ; v2@170.245,37.603 171.62,37.603 171.947,37.276 ; 170.55,31.57 170.55,31.053 170.88,30.723 173.039,30.723 175.96,33.644 177.484,33.644 178.5,34.66 182.437,34.66 ; 171.947,34.101 171.947,37.276 ; 184.825,-4.038 186.062,-5.274 ; v2@190.311,61.584 192.978,61.584 194.683,59.879 194.683,58.875 207.288,58.875 209.361,60.949 214.009,60.949 ; 210.707,-4.558 212.739,-4.558 215.66,-7.479 235.592,-7.479 244.441,1.37 247.502,1.37 247.893,0.979 247.893,-0.735 ; 212.32,-9.371 212.943,-8.749 216.905,-8.749 217.527,-9.371 217.527,-9.921 ; 215.33,50.408 223.192,42.546 223.192,38.985 ; v2@216.56,-41.972 216.981,-41.972 217.464,-41.49 230.443,-41.49 232.907,-39.026 236.971,-39.026 v2@238.52,-40.575 ; 218.132,38.985 223.192,38.985 ; 242.28,57.901 243.778,57.901 244.83,56.849 244.83,55.527 246.126,55.527
  Top Layer w0.3: v1(150.179,-10.806) 150.64,-10.346 151.061,-10.346 ; v1(156.656,-10.4) 156.711,-10.346 157.633,-10.346 ; v1(163.235,-10.4) 163.289,-10.346 164.205,-10.346 ; v1(169.839,-10.4) 169.893,-10.346 170.778,-10.346 ; v1(176.24,-10.273) 176.312,-10.346 177.255,-10.346 ; v1(181.269,-10.298) 181.316,-10.346 182.335,-10.346 ; v1(240.171,3.189) 240.4,3.189 242.102,4.891 243.169,4.891 245.209,6.932 245.209,11.402 246.852,13.044 246.852,13.247 246.953,13.349 246.953,14.492 244.921,16.524 v1(243.296,16.524)
  Top Layer w0.6: v1(134.228,5.526) 134.66,5.094 140.4,5.094 144.693,9.387 v1(144.693,15.381) 144.515,15.559 144.515,36.133 145.302,36.92 v1(145.302,36.946) ; v1(141.061,-20.662) 160.898,-20.662 v1@162.041,-19.519 ; v1(151.703,14.695) 152.973,15.965 152.999,15.965 153.329,16.295 v1(169.305,16.295) ; v1(151.856,17.819) 151.856,18.15 156.885,23.179 177.103,23.179 181.802,18.48 184.571,18.48 187.314,21.223 v1(187.314,21.325) ; v1(170.347,11.088) 170.296,11.038 170.017,11.038 169.305,11.749 v1(169.305,16.295) ; v2(174.662,-40.042) 182.412,-40.042 187.289,-35.165 v1(187.289,-22.998) 188.635,-22.998 191.886,-19.747 v1@191.886,-18.68 ; v1(178.424,18.658) 178.424,19.953 176.011,22.366 169.864,22.366 168.442,20.944 168.442,17.159 v1(169.305,16.295) ; v1(186.831,-9.587) 186.831,-8.266 188.178,-6.92 191.403,-6.92 193.093,-8.609 193.093,-10.558 ; v1(190.895,21.502) v1@191.124,21.502 ; v1(196.433,6.516) 196.407,6.516 196.407,8.523 199.76,11.876 201.513,11.876 v2@203.9,14.263 ; v1@201.068,14.911 199.633,13.476 195.188,13.476 193.918,13.476 189.27,18.124 189.27,22.874 190.616,24.22 v1(191.886,24.22) 191.886,25.16 191.911,25.16 193.435,26.684 206.821,26.684 v1(207.228,27.09) ; v1(230.545,17.235) 230.545,15 231.027,14.517 242.026,14.517 243.296,15.787 v1(243.296,16.524)
  Top Layer w0.63: v1(207.228,27.09) 207.228,26.125 v1(210.733,22.62) ; v1(223.407,23.941) 219.547,20.08 219.547,17.743 219.826,17.464 222.798,17.464 223.992,18.658 v1(224.652,18.658)
  Top Layer w1: v1@191.124,21.502 193.715,18.912 199.049,18.912 200.674,20.537 212.384,20.537 215.406,17.515 v1(215.635,17.515) 215.635,16.194 213.095,13.654 210.809,13.654 208.853,15.61 204.967,15.61 204.967,15.33 v2@203.9,14.263 ; v1(221.325,16.016) 226.76,16.016 227.243,15.533 v1(227.421,15.533) ; 226.532,-2.78 226.735,-2.577 231.637,-2.577 234.685,0.471 239.994,0.471 243.524,4.002 245.277,4.002 v1(246.293,5.018) ; v1(235.498,34.101) 236.463,33.136 236.946,33.136 236.996,33.186 239.74,33.186 ; v1(240.019,34.558) 239.74,34.279 239.74,33.186 ; v1(245.302,34.634) 245.302,33.44 245.048,33.186 ; 246.521,55.615 246.826,55.615 v1(252.643,49.798) ; v1(250.255,34.253) 250.255,33.313 250.128,33.186 ; v1(261.05,-9.054) 261.05,24.398 259.602,25.846 258.14,25.846 258.117,25.823 258.117,30.405 255.335,33.186 250.128,33.186 ; 239.74,33.186 245.048,33.186 ; 245.048,33.186 250.128,33.186
  Bottom Layer w0.25: v1(138.952,1.055) 141.035,1.055 141.772,1.792 146.186,1.792 148.477,-0.499 148.477,-0.63 v1@148.45,-0.657 ; v1@143.22,-9.816 143.308,-9.816 v1(143.398,-9.906) ; v1(158.079,-1.027) 158.079,9.909 157.728,10.26 157.728,19.759 159.145,21.176 159.145,24.099 160.708,25.661 ; 186.704,-1.256 188.025,-1.256 v1(188.203,-1.078) 188.638,-1.078 190.792,1.075 191.904,1.075 192.736,1.907 192.736,2.113 196.433,5.809 v1(196.433,6.516) ; 187.67,-8.47 187.67,-7.555 186.349,-6.234 186.349,-2.932 186.831,-2.45 188.813,-2.45 190.705,-0.557 ; 188.127,-8.497 188.127,-7.149 186.799,-5.821 186.799,-3.237 187.136,-2.9 189.005,-2.9 190.94,-0.965 ; 188.581,-8.876 188.579,-8.874 188.579,-6.946 188.101,-6.468 188.101,-4.262 188.932,-3.431 189.116,-3.431 191.258,-1.288 ; v1(189.524,-8.266) 189.702,-8.089 189.702,-4.431 189.702,-4.228 v1(191.454,-2.475) ; 190.792,8.075 195.351,8.075 197.076,9.8 198.915,9.8 v1(199.252,9.463) ; 190.792,8.575 195.215,8.575 197.133,10.493 202.944,10.493 204.377,11.927 204.638,11.927 209.04,16.328 210.678,16.328 211.864,17.515 211.977,17.515 214.734,20.272 228.296,20.272 v1(228.868,19.699) ; 191.988,-4.431 193.042,-3.377 193.042,-1.175 ; 194.542,-1.175 194.542,-0.15 194.858,0.166 196.712,0.166 197.22,0.674 v2@198.439,0.674 ; v1(195.544,1.284) 196.102,1.843 197.449,1.843 198.134,2.529 200.497,2.529 202.542,0.484 202.542,-1.175 ; 196.042,-1.175 196.042,-2.136 197.068,-3.162 v1(197.068,-3.186) ; 196.042,12.825 196.042,11.605 196.703,10.943 202.758,10.943 206.259,14.445 206.52,14.445 208.853,16.778 210.491,16.778 214.435,20.722 232.94,20.722 236.515,24.296 238.19,24.296 238.774,23.712 238.774,18.547 244.786,12.536 247.969,12.536 253.303,17.87 258.069,17.87 258.117,17.823 258.221,17.718 261.355,17.718 262.549,18.912 ; 196.542,12.825 196.542,11.864 196.89,11.515 196.89,11.393 202.571,11.393 206.092,14.914 206.295,14.914 206.872,15.491 206.872,16.651 207.554,17.333 210.41,17.333 214.251,21.174 217.642,21.174 217.644,21.172 232.754,21.172 236.336,24.754 238.369,24.754 239.292,23.831 239.292,18.667 244.965,12.993 ; 199.542,-3.517 199.542,-6.486 205.843,-12.788 ; 200.042,-3.542 200.042,-6.347 206.297,-12.602 206.297,-13.321 ; 200.542,-3.728 200.542,-6.21 206.751,-12.42 206.751,-14.702 ; 201.042,-2.196 201.042,-6.074 207.201,-12.234 207.201,-13.85 207.205,-13.854 ; v1(201.233,15.076) 201.233,15.051 202.097,15.914 203.24,15.914 202.884,15.559 202.884,14.975 202.042,14.132 202.042,12.825 ; 201.542,-3.444 201.542,-5.937 207.659,-12.055 207.659,-14.326 208.091,-14.758 ; 202.042,-1.175 202.042,-5.801 208.109,-11.869 208.109,-14.139 208.276,-14.306 208.281,-14.306 210.062,-16.086 ; 202.542,12.825 202.716,12.825 205.526,15.635 205.526,15.914 ; 204.792,1.075 207.64,1.075 214.594,-5.879 214.594,-6.031 215.229,-6.666 218.81,-6.666 v1(218.81,-6.59) ; 204.792,1.575 208.054,1.575 215.406,-5.777 217.057,-5.777 217.413,-6.133 217.413,-5.853 v1(217.438,-5.828) ; 204.792,2.075 208.191,2.075 215.593,-5.327 216.524,-5.327 216.848,-5.003 218.976,-5.003 219.267,-5.295 v1(219.267,-4.939) ; 204.792,2.575 208.244,2.575 208.294,2.525 208.377,2.525 209.389,1.513 211.8,1.513 217.057,-3.745 219.369,-3.745 v1(219.394,-3.72) ; 204.792,3.075 203.227,3.075 202.884,2.732 202.884,1.616 203.444,1.056 203.444,-5.93 209.009,-11.496 209.009,-13.761 210.429,-15.18 219.893,-15.18 225.96,-9.113 225.96,-7.923 227.606,-6.278 229.892,-6.278 237.098,0.928 237.377,0.928 ; 204.792,3.575 202.838,3.575 202.351,3.087 202.351,1.513 202.994,0.87 202.994,-6.117 208.559,-11.682 208.559,-13.947 210.245,-15.632 ; 204.792,5.075 207.602,5.075 210.707,1.97 210.707,1.963 211.986,1.963 213.871,0.078 214.378,0.078 217.261,-2.805 v1(218.023,-2.805) ; 204.792,5.575 207.763,5.575 210.556,2.782 210.556,2.758 210.901,2.413 212.373,2.413 213.019,1.767 213.325,1.767 216.906,-1.815 218.785,-1.815 ; 204.792,6.075 208.05,6.075 211.099,3.026 213.501,3.026 214.176,2.351 214.213,2.351 217.265,-0.702 219.247,-0.702 v1(219.572,-1.027) ; 204.792,6.575 208.186,6.575 211.286,3.476 213.705,3.476 214.049,3.131 214.069,3.131 217.452,-0.252 218.392,-0.252 218.581,-0.062 219.115,-0.062 219.451,0.274 v1(219.611,0.274) ; 204.792,7.075 208.422,7.075 211.571,3.926 213.911,3.926 217.638,0.198 217.997,0.198 217.997,0.268 218.48,0.751 v1(218.48,0.878) ; 204.792,7.575 208.558,7.575 211.757,4.376 215.475,4.376 216.321,5.221 216.321,7.355 214.924,8.752 214.924,10.198 215.865,11.139 218.886,11.139 220.182,9.844 223.509,9.844 224.66,10.995 237.132,10.995 237.53,11.393 237.53,13.603 236.006,15.127 236.006,17.896 235.98,17.896 235.345,18.531 235.345,21.782 236.717,23.153 v1(237.53,23.153) ; 204.792,9.575 208.535,9.575 211.541,6.569 213.478,6.569 214.282,7.373 214.282,9.1 214.365,9.183 214.365,10.987 214.898,11.52 214.924,11.52 216.448,13.044 217.388,13.044 217.489,13.146 217.798,12.837 219.347,12.837 ; 204.792,10.075 208.671,10.075 211.728,7.019 213.04,7.019 213.832,7.81 213.832,11.139 213.984,11.292 213.984,12.591 215.339,13.946 217.489,13.946 218.148,13.287 221.082,13.287 222.493,11.876 v1(222.493,11.749) ; 204.792,10.575 208.808,10.575 211.914,7.469 212.854,7.469 213.324,7.939 213.324,12.567 215.152,14.396 218.302,14.396 218.96,13.737 221.672,13.737 223.655,11.754 235.909,11.754 v2(236.412,12.257) ; v1(205.881,-2.907) 206.859,-3.884 206.859,-7.694 209.909,-10.745 209.909,-13.388 ; v1(206.034,-5.168) 206.034,-7.884 209.459,-11.31 209.459,-13.574 210.615,-14.73 219.706,-14.73 223.458,-10.979 223.458,-8.03 221.942,-6.514 221.942,-2.356 221.756,-2.17 221.756,0.42 222.874,1.538 222.874,1.894 ; v1(207.355,13.349) 208.335,13.349 211.688,16.702 211.85,16.702 214.924,19.775 214.924,19.822 227.527,19.822 228.386,18.962 228.386,18.708 v1(228.259,18.581) ; 210.554,-14.033 209.909,-13.388 ; 210.606,-15.632 210.245,-15.632 ; v1(210.707,-9.054) 220.283,-9.054 220.436,-8.901 ; 211.368,15.254 211.368,9.285 v1(212.231,8.421) ; 212.562,20.124 214.061,21.624 231.95,21.624 231.952,21.622 232.329,21.622 233.994,23.286 ; 212.578,21.537 213.564,22.524 231.947,22.524 233.783,24.36 ; v1(212.892,15.686) 213.73,14.848 218.531,14.848 219.191,14.187 221.858,14.187 223.839,12.206 225.033,12.206 ; 213.044,21.361 213.757,22.074 232.139,22.074 232.142,22.074 234.055,23.987 ; 213.374,-15.634 210.247,-15.634 210.245,-15.632 ; v1(214.035,16.88) 214.695,16.219 219.039,16.219 ; v1(215.94,10.047) 216.499,10.047 220.436,6.11 220.436,-8.901 ; v1(217.718,10.225) 220.207,7.736 v1(220.334,7.736) ; 218.861,28.386 v2(218.861,27.675) 221.756,27.675 v1(222.214,27.217) ; 219.369,12.816 219.347,12.837 ; v1(220.69,-11.543) 220.69,-11.518 220.436,-11.264 220.436,-8.901 ; v1(220.969,12.231) 220.969,12.333 220.465,12.837 219.347,12.837 ; v1(222.62,-0.672) 222.62,-1.485 223.846,-2.711 223.846,-4.115 225.109,-5.378 228.31,-5.378 233.651,-0.037 233.651,1.547 242.377,10.273 254.697,10.273 256.247,11.823 258.117,11.823 ; v1(222.874,-3.237) 222.874,-3.796 223.458,-4.38 223.458,-4.482 224.804,-5.828 229.046,-5.828 234.101,-0.773 234.101,1.36 242.563,9.823 258.117,9.823 ; v1(223.788,-1.307) 224.322,-1.84 224.322,-3.669 225.581,-4.928 228.123,-4.928 233.201,0.15 233.201,1.733 242.19,10.723 254.37,10.723 257.47,13.823 258.117,13.823 ; 224.347,22.976 226.151,22.976 227.167,23.992 ; 226.483,7.38 228.284,7.38 230.215,9.31 236.083,9.31 237.98,11.207 237.98,15.515 v1(237.123,16.372) ; 226.532,2.3 232.932,2.3 239.816,9.183 239.816,15.864 v1(237.073,18.607) ; 226.532,9.92 225.008,9.92 221.121,6.034 221.121,-2.907 221.306,-3.092 221.306,-10.026 221.858,-10.578 221.858,-11.69 219.267,-14.28 210.86,-14.28 209.967,-13.388 209.909,-13.388 ; 228.741,26.405 229.453,25.693 229.453,23.992 ; v1(232.653,-5.193) 233.39,-5.93 234.56,-5.93 234.953,-5.536 249.353,-5.536 249.366,-5.523 254.903,-5.523 256.249,-4.177 258.117,-4.177 ; v1(233.974,-9.409) 236.438,-9.409 237.657,-8.19 v1(237.936,-8.19) ; v1(234.202,-4.99) 253.659,-4.99 256.471,-2.177 258.117,-2.177 ; v1(235.295,-6.361) 235.625,-6.692 245.074,-6.692 246.559,-8.177 258.117,-8.177 ; v2(235.345,-2.602) 237.929,-2.602 239.867,-4.54 253.456,-4.54 257.818,-0.177 258.117,-0.177 ; 237.377,-1.358 239.079,-1.358 240.273,-0.164 ; v1(240.73,-11.391) 240.73,-8.266 v1(241.314,-7.682) ; v1(242.483,6.059) 243.423,6.059 245.607,8.244 251.297,8.244 255.818,3.722 258.016,3.722 258.117,3.823 259.248,3.823 261.736,1.335 262.142,1.335 ; 242.816,0.844 248.409,0.844 248.934,0.319 250.636,2.021 257.918,2.021 258.117,1.823 ; v1(243.118,8.244) 243.568,8.694 251.71,8.694 254.581,5.823 258.117,5.823 259.941,5.823 262.142,3.621 ; 244.972,12.986 244.965,12.993 ; v1(245.607,14.187) 245.607,14.111 247.6,14.111 252.668,19.179 252.668,20.486 254.091,21.909 258.03,21.909 258.117,21.823 259.491,21.823 261.152,23.484 262.549,23.484 ; 258.117,23.823 260.094,23.823 261.279,25.008 263.666,25.008 264.835,23.839 ; 262.536,21.233 261.441,21.233 259.983,19.775 258.164,19.775 258.117,19.823 257.859,20.08 254.243,20.08 247.156,12.993 244.965,12.993 ; 264.835,18.912 264.835,23.484